# Altium PCB COMM-TH_L55.2-W28.0-W5500_2024-08-15.pcbdoc
Units mm, origin at the board's own origin, x right, y up, seen from the top; angles counter-clockwise.
Board outline 87.53 x 53.91 mm, 2 copper layers (Top Layer, Bottom Layer); 1 components, 0 nets, 12 pads, 0 vias.
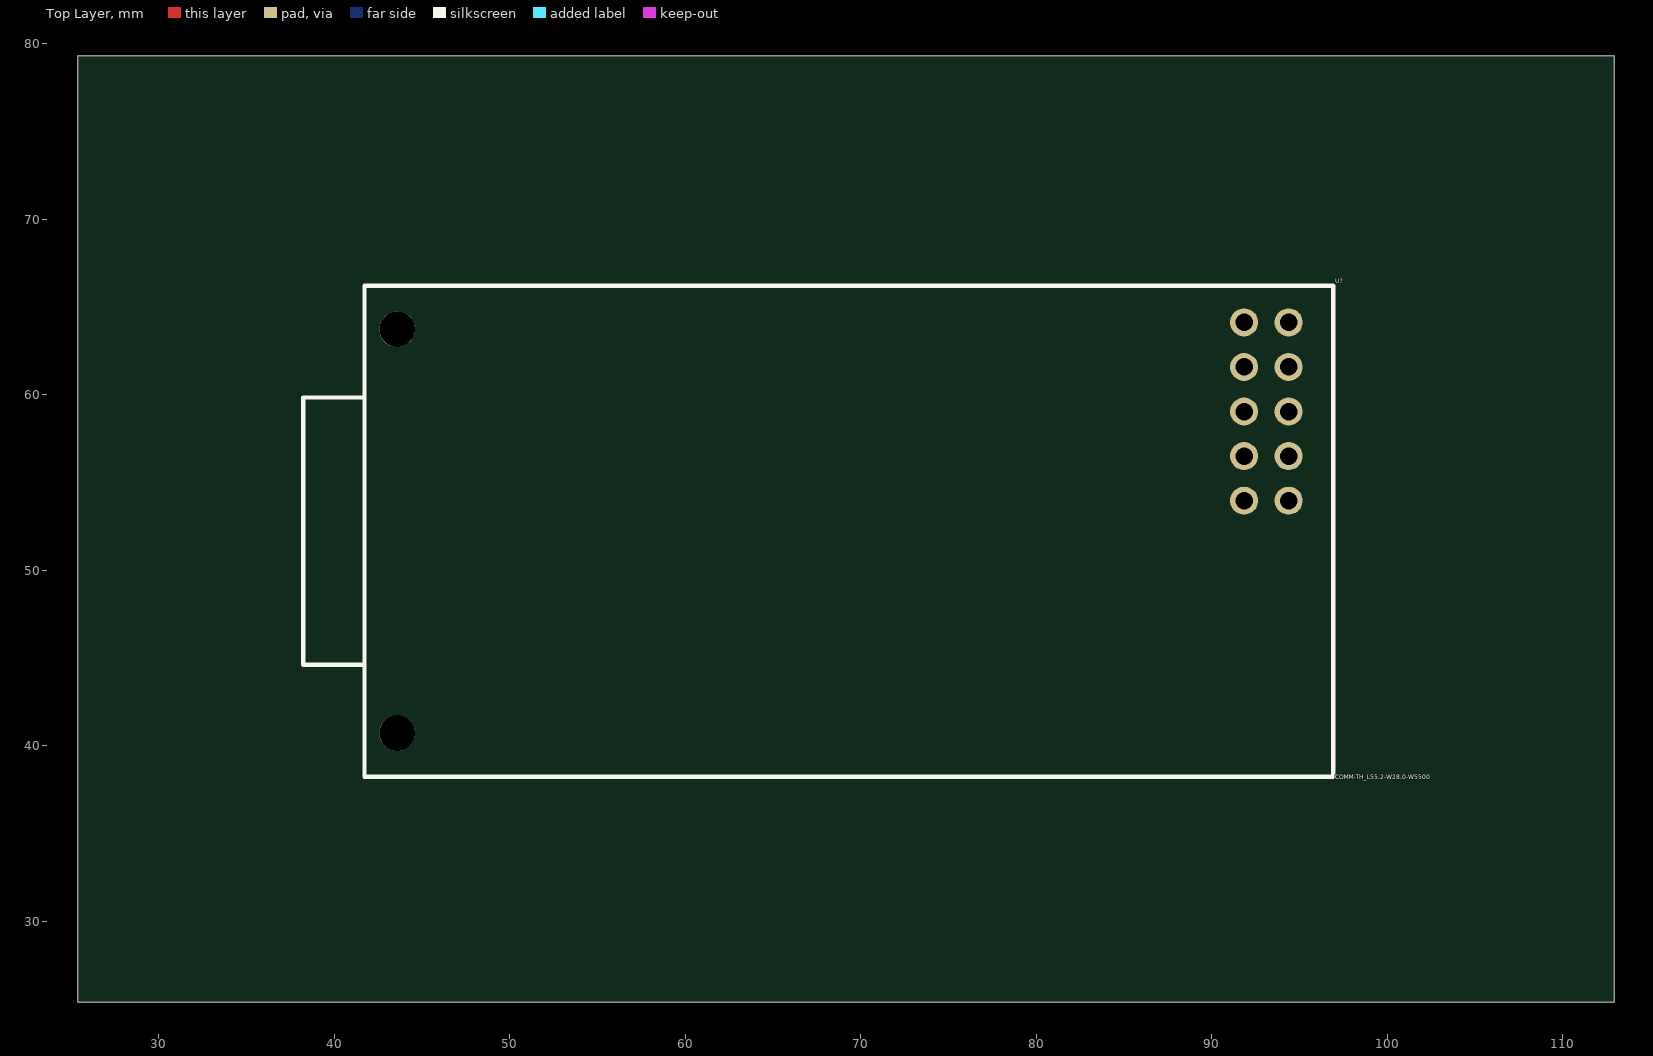
[diagram p0: Top Layer view]
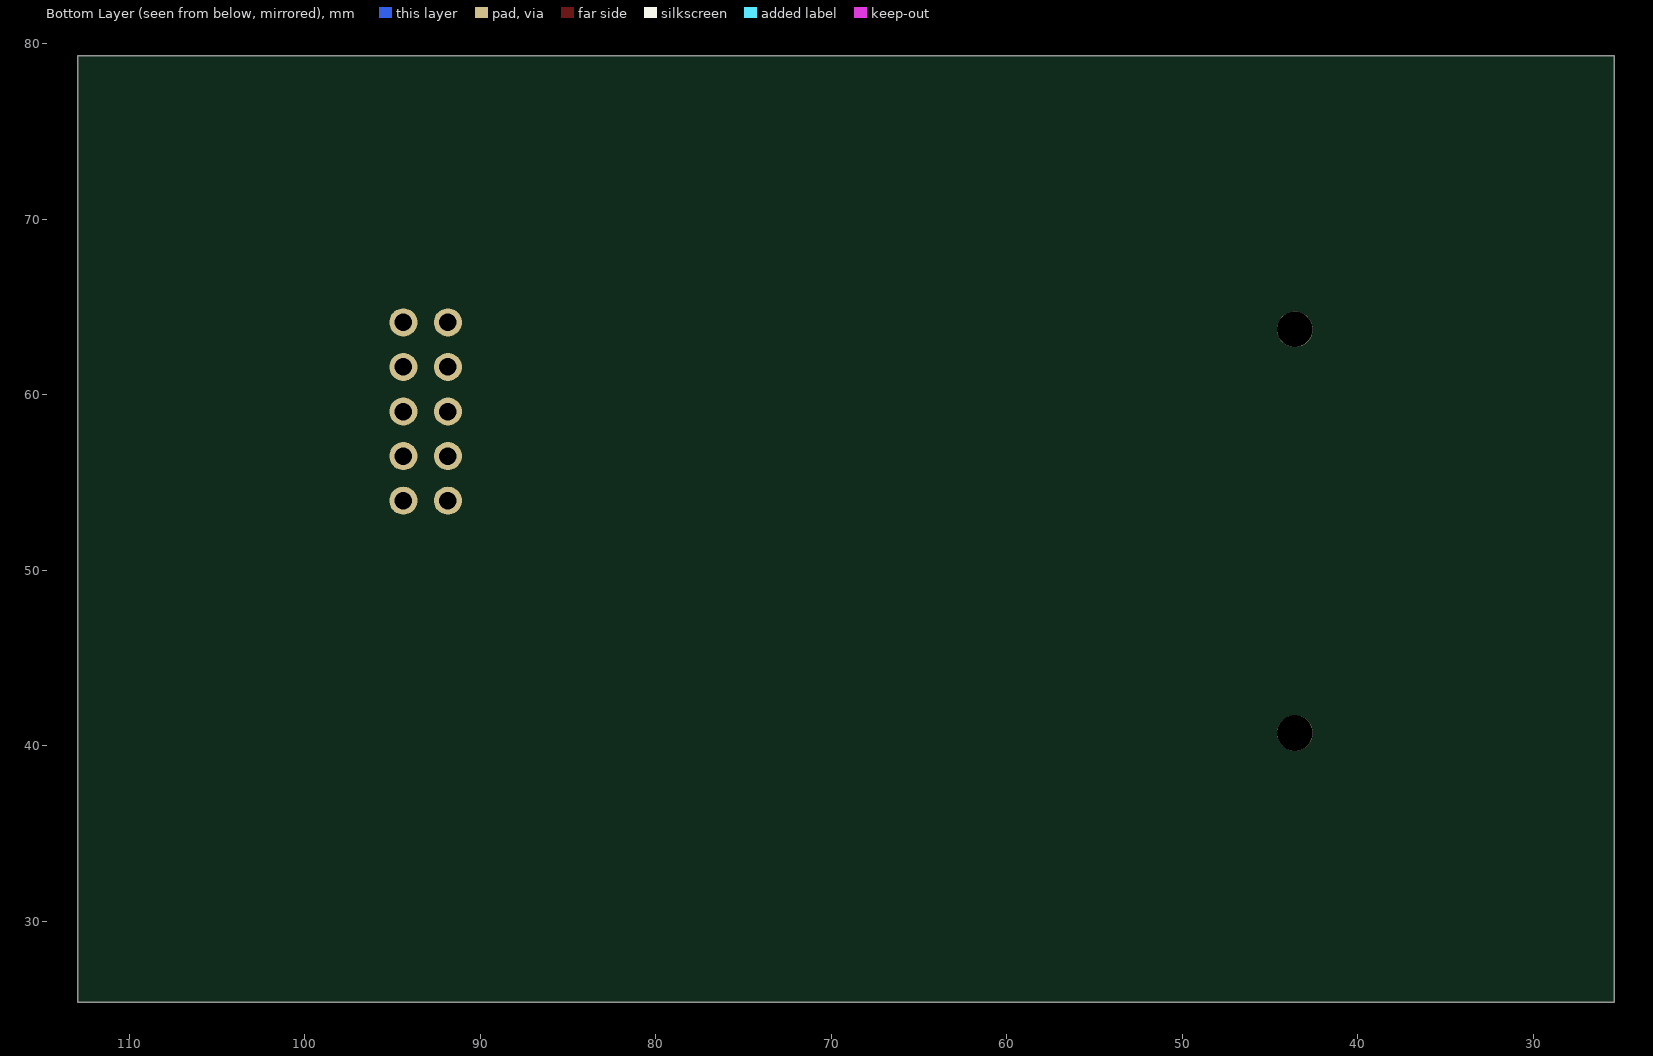
[diagram p1: Bottom Layer view, seen from below]

## Layer stack, top to bottom
Top Layer: signal copper (thickness not stored)
Dielectric: dielectric 0.32, FR-4, Dk 4.8
Bottom Layer: signal copper (thickness not stored)

## Board outline
112.929,25.4 25.4,25.4 25.4,79.308 112.929,79.308

## Components (designator, comment, footprint, x,y, rotation, side; value= is the part's Value field where it differs from the comment)
U? "COMM-TH_L55.2-W28.0-W5500" COMM-TH_L55.2-W28.0-W5500 67.577,52.227 r0 top

## Footprints (in the part's own frame and the unit in brackets; to place one, negate y for a bottom-side part, rotate by r counter-clockwise, add the part's x,y. Pads: shape width x height; smd on the part's side, far side on the other; paste and mask are expansions set on the pad)
COMM-TH_L55.2-W28.0-W5500 [mm]
  round 1.6 hole 1 paste+0.102 mask+0.051: 1(24.27,11.9) 2(24.27,9.36) 3(24.27,6.82) 4(24.27,4.28) 5(24.27,1.74) 6(26.81,1.74) 7(26.81,4.28) 8(26.81,6.82) 9(26.81,9.36) 10(26.81,11.9)
  round 2.032 hole 2.032 unplated paste+0: ""(-23.99,-11.5) ""(-23.99,11.5)
  silkscreen extent -29.35,-14 29.35,14

## Nets (pads, with @x,y where several pads share a name; then routed paths per layer and width w, separated by ;. In a path a pad name is that pad's centre, name@x,y a point inside that pad or via, vN(x,y) a via of type N, cw(c..) or ccw(c..) an arc to the next point about the centre after c; other vN are vias at no path point)
pads on no net: U?. U?.1 U?.2 U?.3 U?.4 U?.5 U?.6 U?.7 U?.8 U?.9 U?.10

## Silkscreen, mask and mechanical layers (free items; w line width, h text height)
Document:
  lines w0.003: 69.164,52.354 69.165,52.354